# Altium PCB DClink.PcbDoc
Units mm, origin at the board's own origin, x right, y up, seen from the top; angles counter-clockwise.
Board outline 361 x 115 mm, 4 copper layers (Top Layer, Layer 1, Layer 2, Bottom Layer), stack 1.006 mm thick; 21 components, 3 nets, 63 pads, 0 vias.
Unrouted connection lines stored in the file: 60.
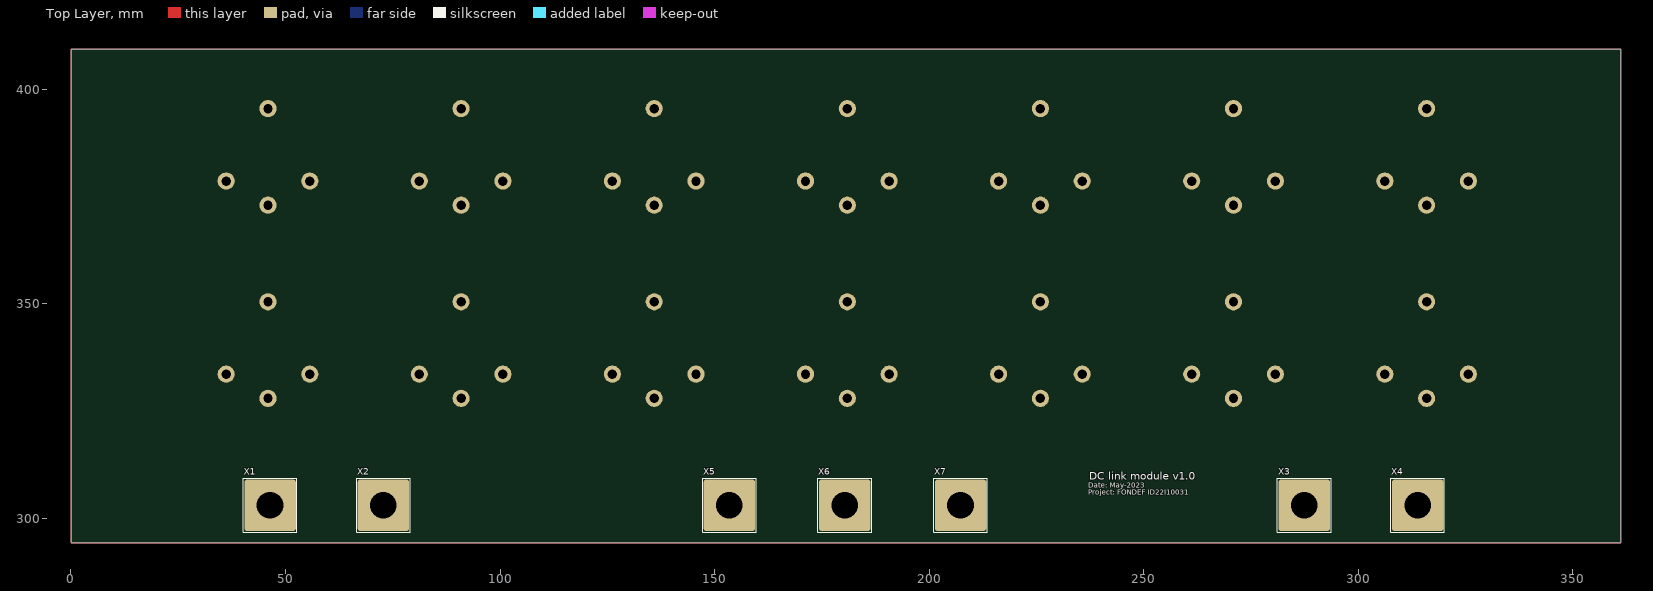
[diagram p0: Top Layer view]
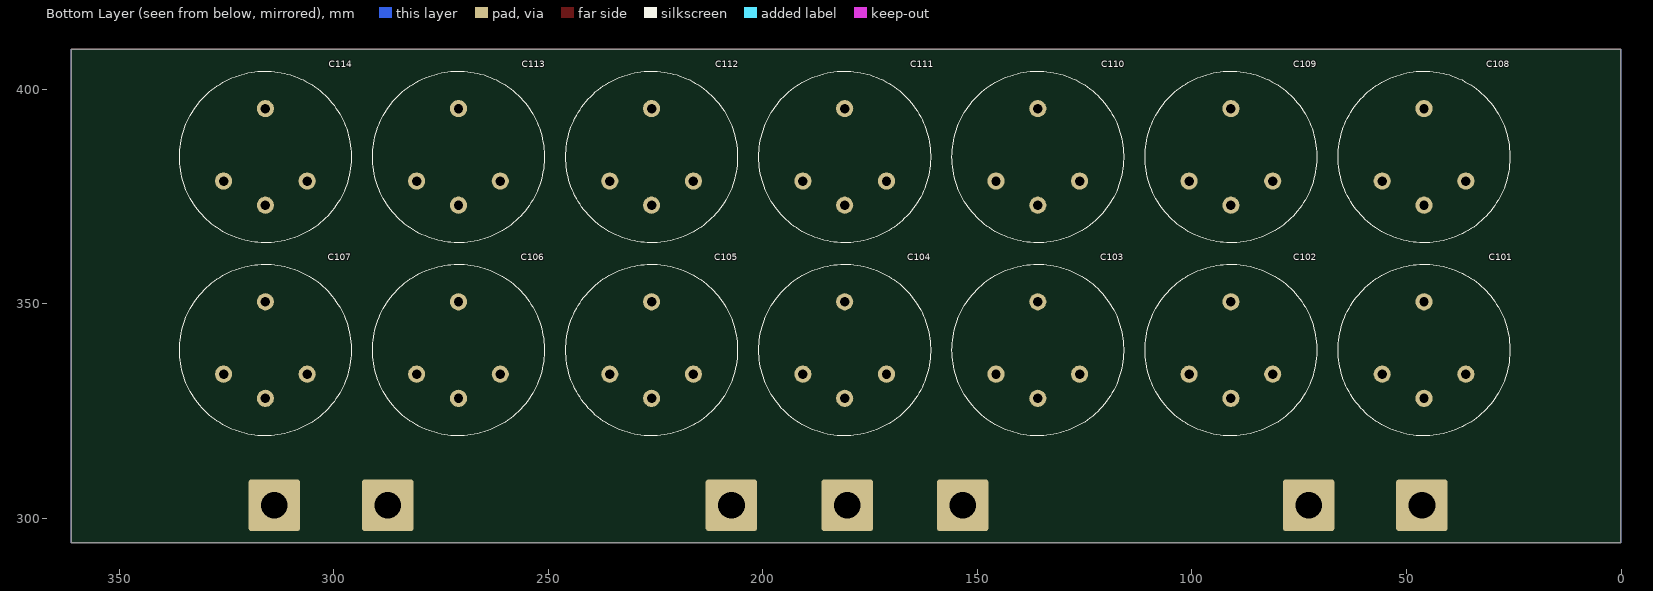
[diagram p1: Bottom Layer view, seen from below]

## Layer stack, top to bottom
Top Solder: solder mask 0.0254, SM-003, Dk 4
Top Layer: signal copper 0.1067
Dielectric 1: core 0.254, FR-4, Dk 4.2
Layer 1: signal copper 0.1067
Dielectric 3: prepreg 0.0711, PP-006, Dk 4.1
Layer 2: signal copper 0.1067
Dielectric 2: core 0.254, FR-4, Dk 4.2
Bottom Layer: signal copper 0.1067
Bottom Solder: solder mask 0.0254, SM-003, Dk 4

## Board outline
0.127,294.303 361.127,294.303 361.127,409.303 0.127,409.303

## Design rules (kind name [scope] priority, off if disabled: settings)
Clearance [All] p1: gap=1 ignorepadtopadclearanceinfootprint=FALSE
PolygonConnect [All] p1: connectstyle=Relief reliefconductorwidth=0.254 reliefentries=4 polygonreliefangle="90 Angle" airgapwidth=0.254
RoutingVias [All] p1: holewidth=0.711 width=1.27 viastyle="Through Hole" minholewidth=0.711 minwidth=1.27 maxholewidth=0.711 maxwidth=1.27
SolderMaskExpansion [All] p1: expansion=0.102 istentingtop=FALSE
Width [All] p1: maxlimit=0.254 minlimit=0.254 preferedwidth=0.254
30 further rules are at their usual default settings.

## Components (designator, comment, footprint, x,y, rotation, side; value= is the part's Value field where it differs from the comment)
C101 "100nF" CAP_EL450_ALC70C152EN450 45.932,327.999 r180 bottom
C102 "100nF" CAP_EL450_ALC70C152EN450 90.932,327.999 r180 bottom
C103 "100nF" CAP_EL450_ALC70C152EN450 135.932,327.999 r180 bottom
C104 "100nF" CAP_EL450_ALC70C152EN450 180.932,327.999 r180 bottom
C105 "100nF" CAP_EL450_ALC70C152EN450 225.932,327.999 r180 bottom
C106 "100nF" CAP_EL450_ALC70C152EN450 270.932,327.999 r180 bottom
C107 "100nF" CAP_EL450_ALC70C152EN450 315.932,327.999 r180 bottom
C108 "100nF" CAP_EL450_ALC70C152EN450 45.932,372.999 r180 bottom
C109 "100nF" CAP_EL450_ALC70C152EN450 90.932,372.999 r180 bottom
C110 "100nF" CAP_EL450_ALC70C152EN450 135.932,372.999 r180 bottom
C111 "100nF" CAP_EL450_ALC70C152EN450 180.932,372.999 r180 bottom
C112 "100nF" CAP_EL450_ALC70C152EN450 225.932,372.999 r180 bottom
C113 "100nF" CAP_EL450_ALC70C152EN450 270.932,372.999 r180 bottom
C114 "100nF" CAP_EL450_ALC70C152EN450 315.932,372.999 r180 bottom
X1 "M6 Pad" "M6 PAD Connector" 46.412,303.079 r0 top
X2 "M6 Pad" "M6 PAD Connector" 72.828,303.079 r0 top
X3 "M6 Pad" "M6 PAD Connector" 287.412,303.079 r0 top
X4 "M6 Pad" "M6 PAD Connector" 313.828,303.079 r0 top
X5 "M6 Pad" "M6 PAD Connector" 153.46,303.079 r0 top
X6 "M6 Pad" "M6 PAD Connector" 180.327,303.079 r0 top
X7 "M6 Pad" "M6 PAD Connector" 207.315,303.079 r0 top

## Footprints (in the part's own frame and the unit in brackets; to place one, negate y for a bottom-side part, rotate by r counter-clockwise, add the part's x,y. Pads: shape width x height; smd on the part's side, far side on the other; paste and mask are expansions set on the pad)
CAP_EL450_ALC70C152EN450 [mm]
  round 4 hole 2.2: 1(-9.743,5.625) 1(0,0) 1(9.743,5.625) 2(0,22.5)
  silkscreen extent -20,-8.75 20,31.25, body extent -20,-8.75 20,31.25, height 100
"M6 PAD Connector" [mm]
  rrect10% 12x12 hole 6.2: 1(0,0)
  silkscreen extent -6.25,-6.25 6.25,6.25

## Part data
C101 C102 C103 C104 C105 C106 C107 C108 C109 C110 C111 C112 C113 C114: library part "Cap_HV_El_ ALC70C152EN450", "0.1µF ±10% 50V Ceramic Capacitor X7R 1206 (3216 Metric)", Package=1206, Supplier Part Number 1=399-7356-1-ND, Created=2020_06_15_DAarancibia, MF=KEMET, MFP=C1206C104K5RAC7025, Supplier 1=Digi-Key
X1 X2 X3 X4 X5 X6 X7: library part Con_Pad_M6, "Pad M6", Created=2021_07_09_DArancibia

## Nets (pads, with @x,y where several pads share a name; then routed paths per layer and width w, separated by ;. In a path a pad name is that pad's centre, name@x,y a point inside that pad or via, vN(x,y) a via of type N, cw(c..) or ccw(c..) an arc to the next point about the centre after c; other vN are vias at no path point)
N-: C108.2 C109.2 C110.2 C111.2 C112.2 C113.2 C114.2 X2.1 X4.1 X7.1
O: C101.2 C102.2 C103.2 C104.2 C105.2 C106.2 C107.2 C108.1 C109.1 C110.1 C111.1 C112.1 C113.1 C114.1 X6.1
P+: C101.1 C102.1 C103.1 C104.1 C105.1 C106.1 C107.1 X1.1 X3.1 X5.1
copper on no net: | length 952
  Top Layer w0.254: 0.127,294.303 361.127,294.303 361.127,409.303 0.127,409.303 0.127,294.303

## Polygon pours and split planes (outlines as drawn)
P+ on Top Layer "P+_L01_P007" (solid, pour order 7): 0.127,294.303 361.127,294.303 361.127,409.303 0.127,409.303
O on Layer 2 "O_L03_P006" (solid, pour order 6): 0.127,294.303 361.127,294.303 361.127,409.303 0.127,409.303
N- on Bottom Layer "N-_L04_P008" (solid, pour order 8): 0.127,294.303 361.127,294.303 361.127,409.303 0.127,409.303
O on Layer 1 "O_L02_P009" (solid, pour order 9): 0.127,294.303 361.127,294.303 361.127,409.303 0.127,409.303

## Silkscreen, mask and mechanical layers (free items; w line width, h text height)
Top Overlay:
  text "DC link module v1.0" at 237.368,308.458 h3
  text "Date: May-2023" at 237.118,306.733 h2
  text "Project: FONDEF ID22I10031" at 237.118,305.008 h2